# Altium PCB RFFE-Ver1.PcbDoc (part 1 of 2)
Units mm, origin at the board's own origin, x right, y up, seen from the top; angles counter-clockwise.
Board outline 405.96 x 196.35 mm, 6 copper layers (Top Layer, Internal Plane 1, Mid-Layer 1, Mid-Layer 2, Internal Plane 2, Bottom Layer); 512 components, 366 nets, 2013 pads, 0 vias.
Unrouted connection lines stored in the file: 1522.
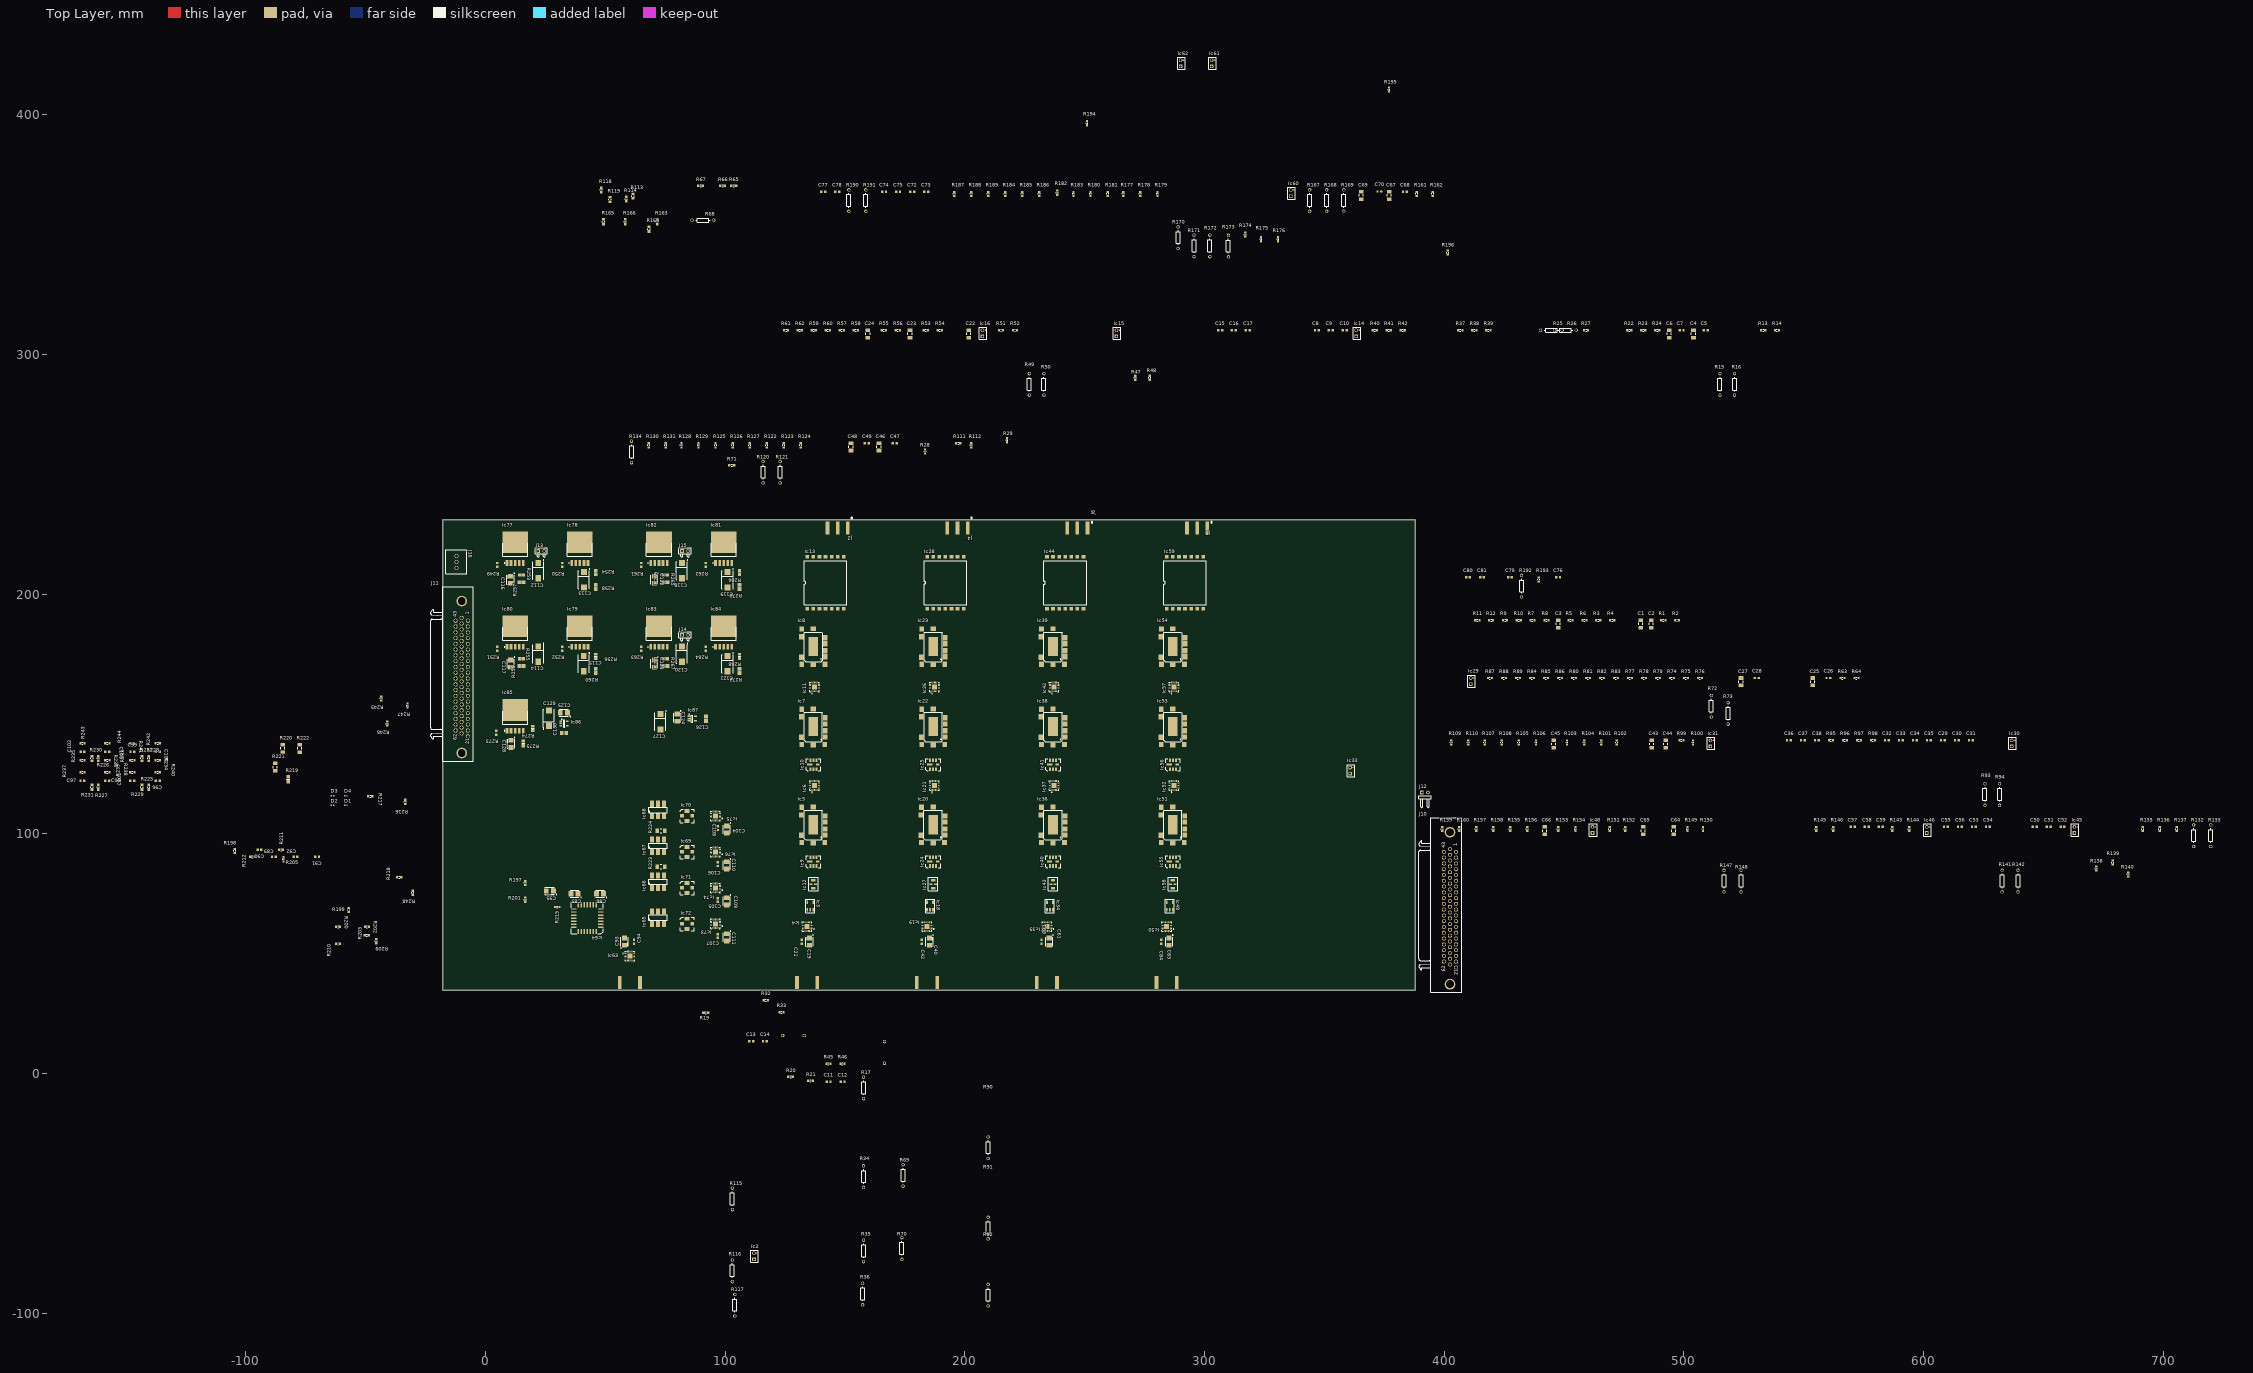
[diagram p0: Top Layer view]
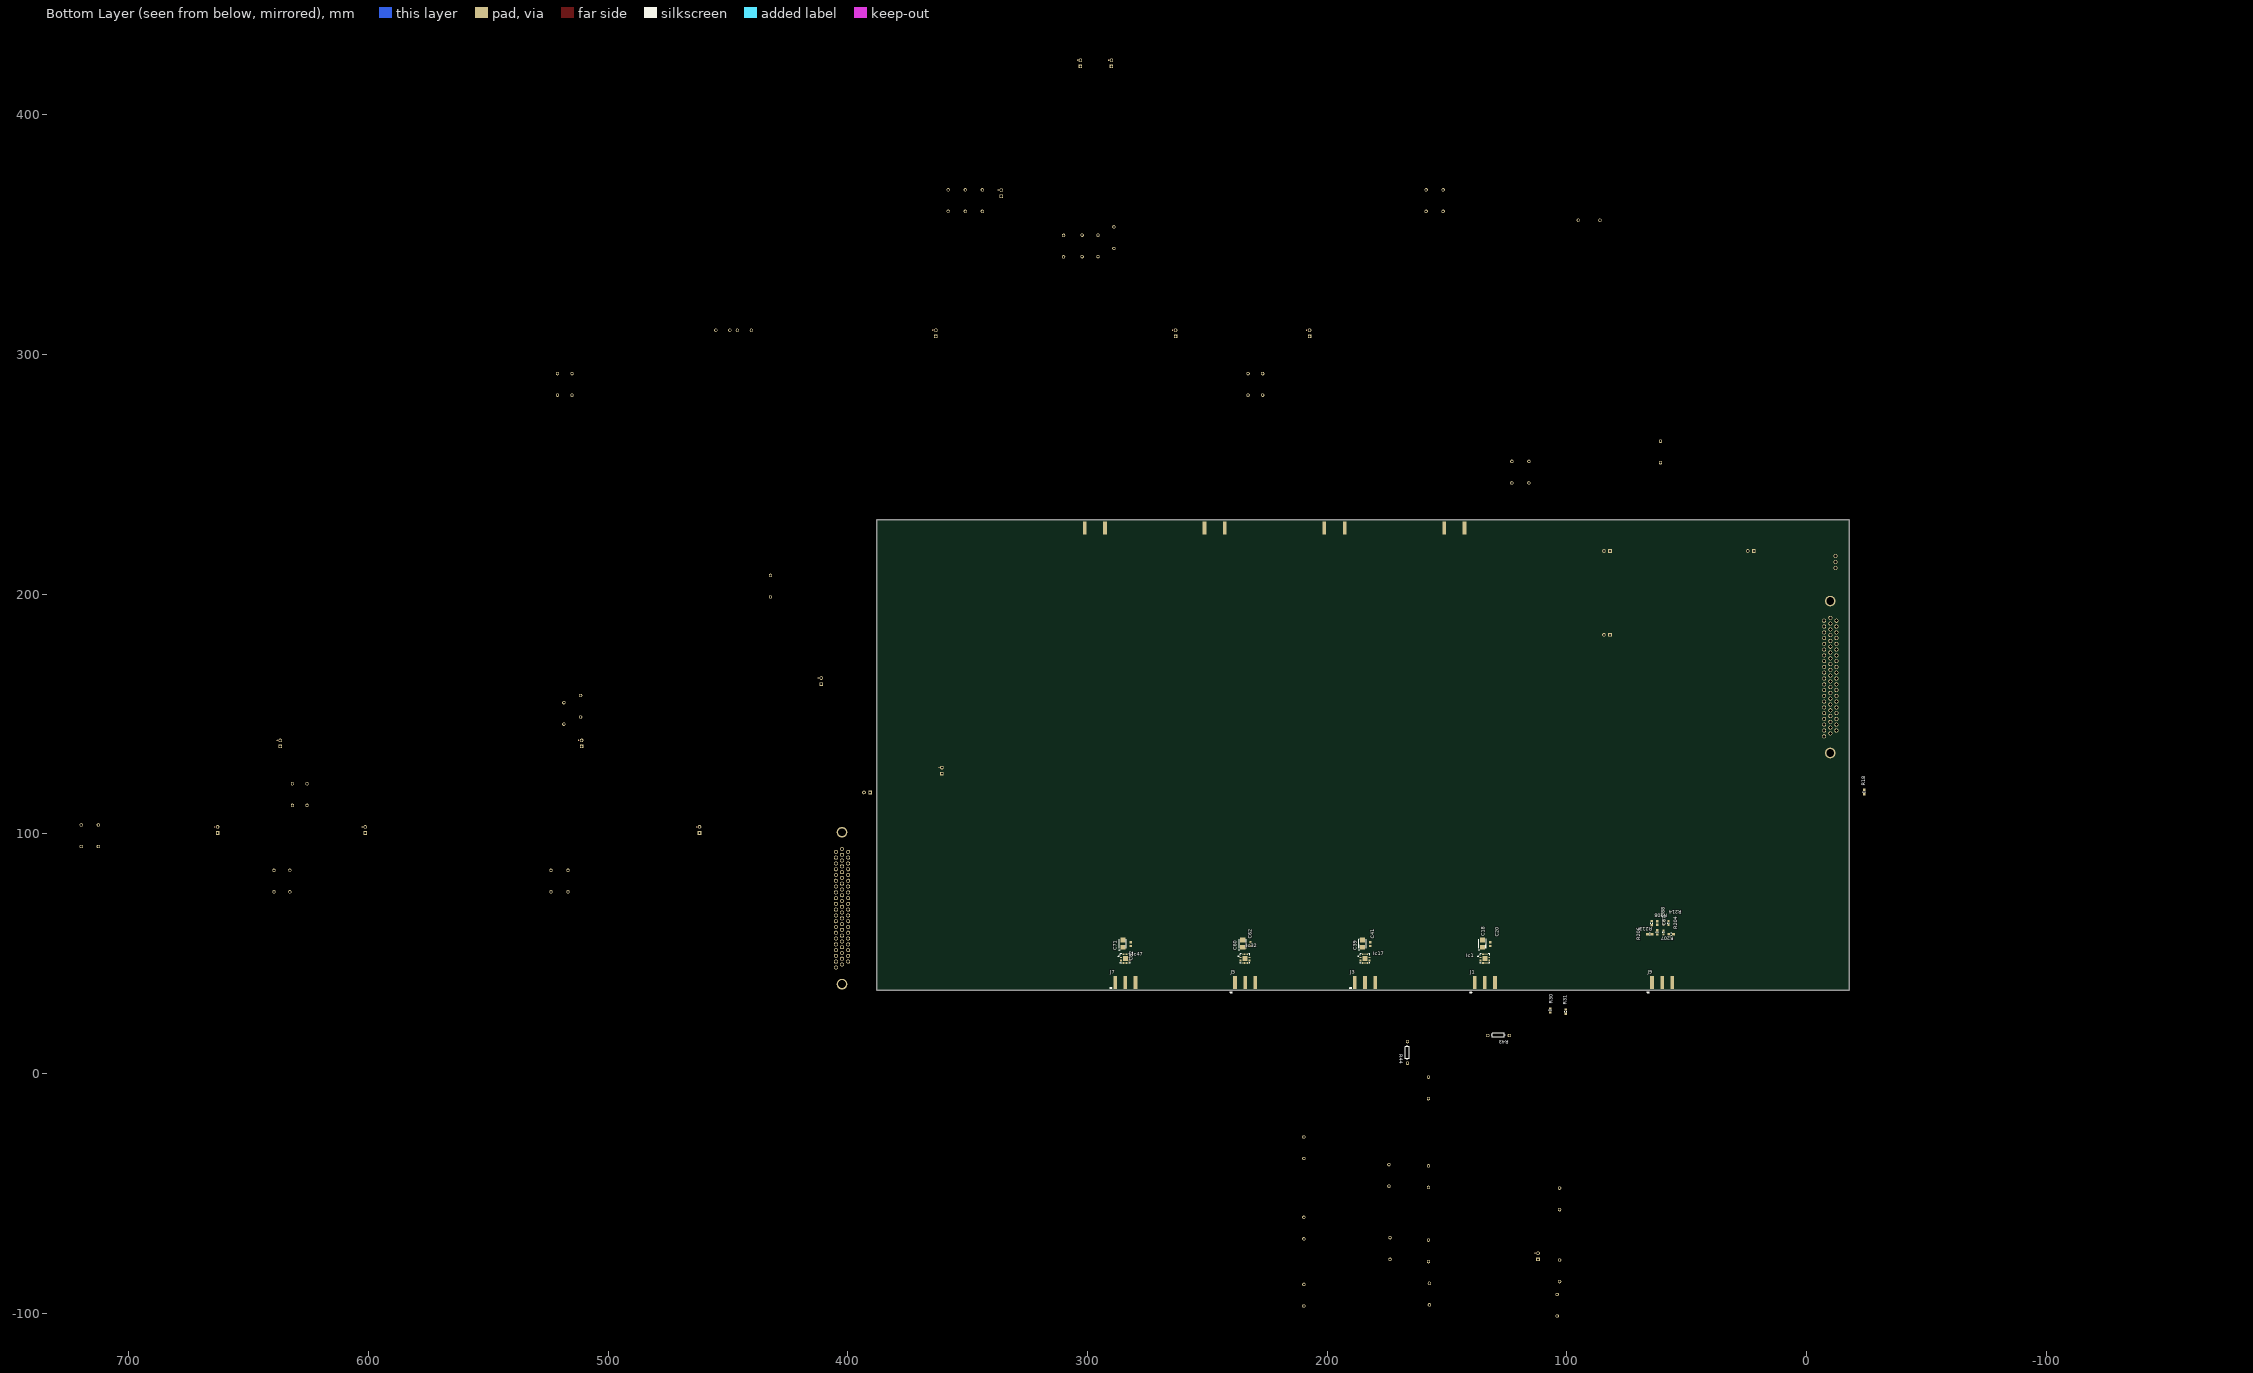
[diagram p1: Bottom Layer view, seen from below]
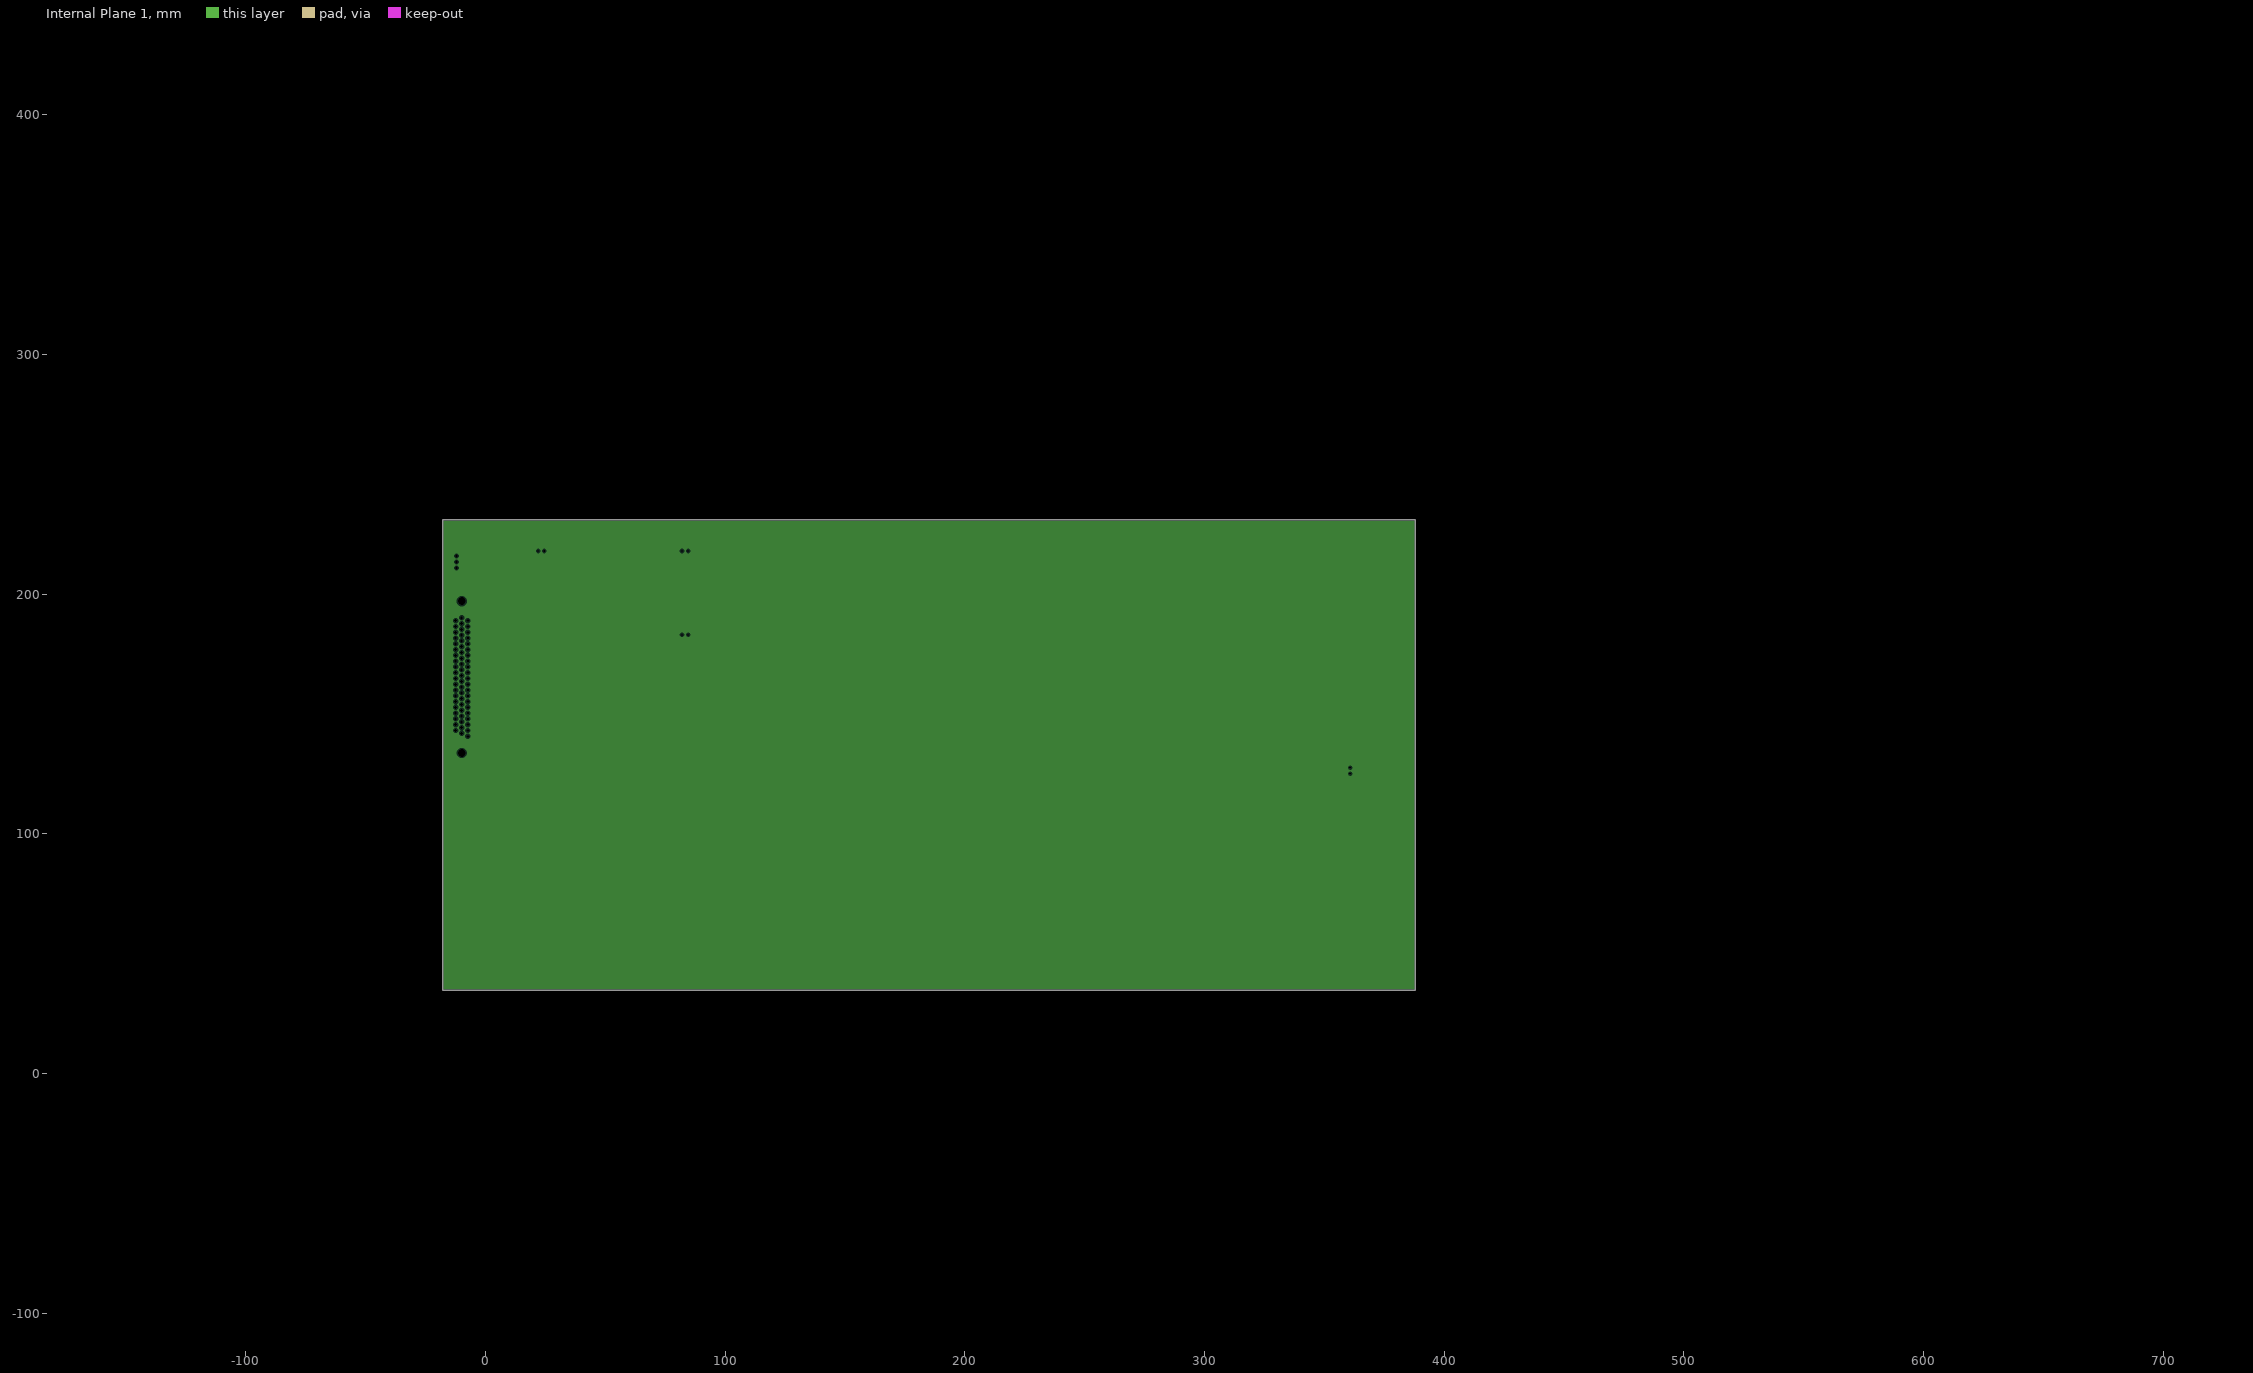
[diagram p2: Internal Plane 1, clearances drawn from the general rule]
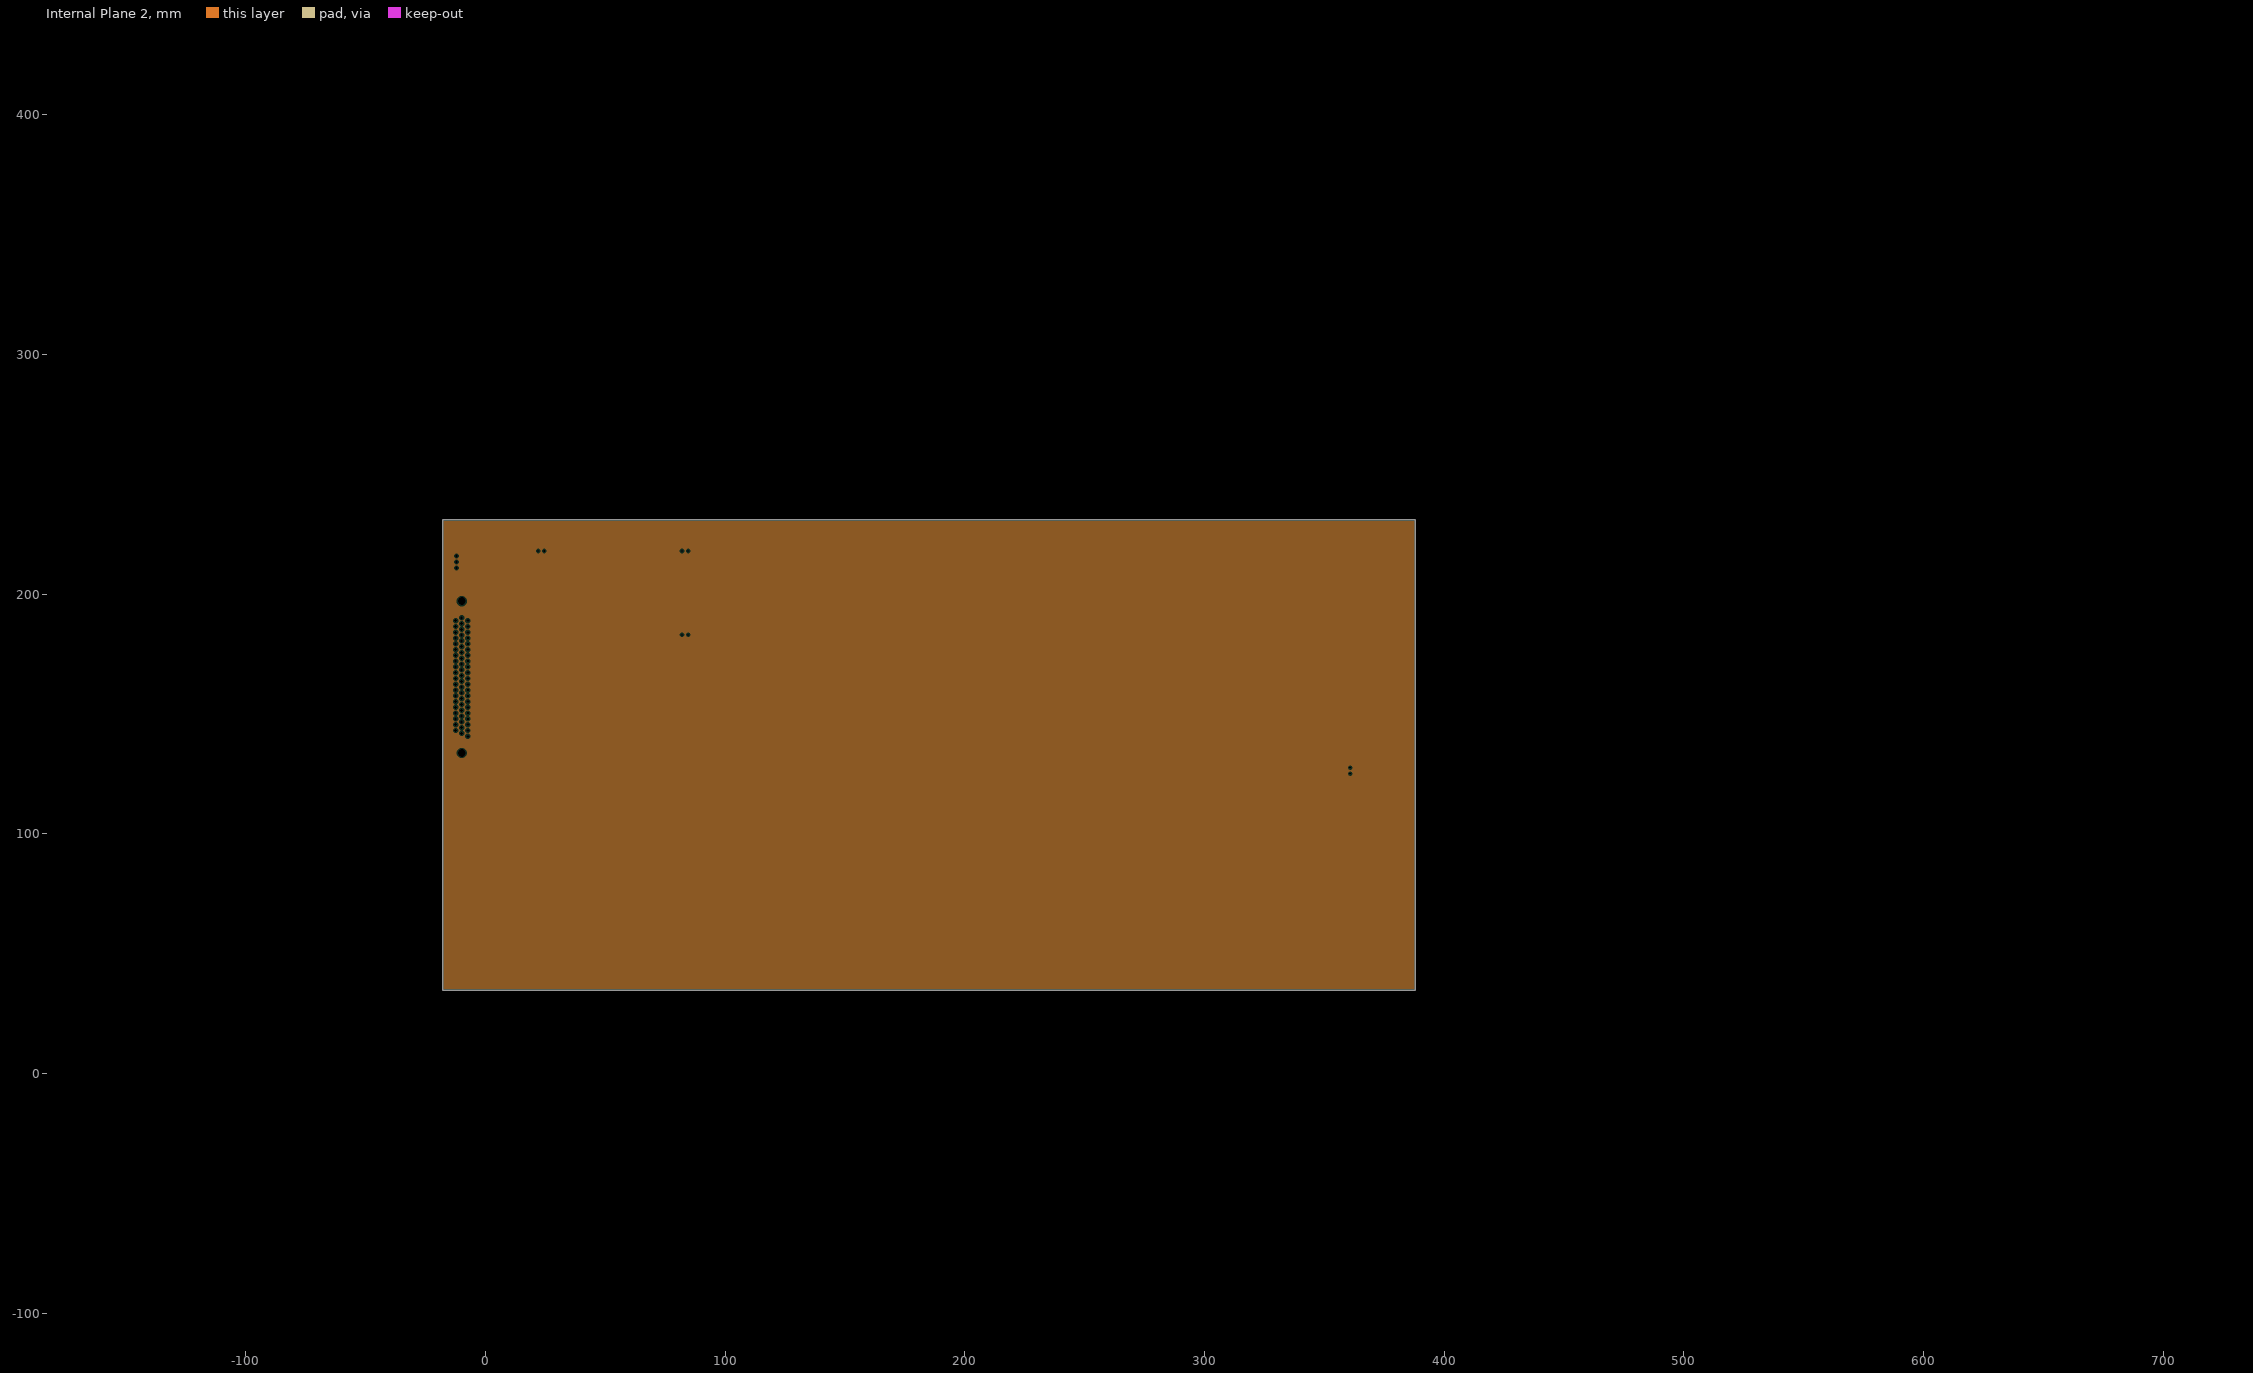
[diagram p3: Internal Plane 2, clearances drawn from the general rule]

## Layer stack, top to bottom
Top Layer: signal copper 0.0356
Dielectric: core 0.32, FR-4, Dk 4.8
Internal Plane 1: plane copper 0.0356
Dielectric: prepreg 0.32, FR-4, Dk 4.8
Mid-Layer 1: signal copper 0.0356
Dielectric: core 0.32, FR-4, Dk 4.8
Mid-Layer 2: signal copper 0.0356
Dielectric: prepreg 0.32, FR-4, Dk 4.8
Internal Plane 2: plane copper 0.0356
Dielectric: core 0.32, FR-4, Dk 4.8
Bottom Layer: signal copper 0.0356

## Board outline
-17.91,231 -17.91,34.65 -12.1,34.65 388.05,34.65 388.05,231 -17.91,231

## Design rules (kind name [scope] priority, off if disabled: settings)
Clearance [All] p1: gap=0.254
PlaneClearance [All] p1: clearance=0.508
PlaneConnect [All] p1: planeconnectstyle=Relief reliefexpansion=0.508 reliefentries=4 reliefconductorwidth=0.254 reliefairgap=0.254
PolygonConnect [All] p1: connectstyle=Relief reliefconductorwidth=0.254 reliefentries=4 polygonreliefangle="90 Angle"
RoomDefinition RFFE-Pilot-Ver1 [InComponentClass('RFFE-Pilot-Ver1')] p1: confinementstyle=ConfineIn formatcopy=TRUE lockcomponents=FALSE outline -17.91,34.65 112.5,34.65 112.5,127.01 -17.91,127.01
RoomDefinition RFFE-Ver1 [InComponentClass('RFFE-Ver1')] p2: confinementstyle=ConfineIn formatcopy=TRUE lockcomponents=FALSE outline 112.5,34.65 369.5,34.65 369.5,231 112.5,231
RoomDefinition RFFE-Supply-Ver1 [InComponentClass('RFFE-Supply-Ver1')] p3: confinementstyle=ConfineIn formatcopy=TRUE lockcomponents=FALSE outline -17.91,127.01 112.5,127.01 112.5,231 -17.91,231
RoutingVias [All] p1: holewidth=0.711 width=1.27 viastyle="Through Hole" minholewidth=0.711 minwidth=1.27 maxholewidth=0.711 maxwidth=1.27
SilkscreenOverComponentPads [All] p1: minsilkscreentomaskgap=0.254
SolderMaskExpansion [All] p1: expansion=0.102
Width [All] p1: maxlimit=0.254 minlimit=0.254 preferedwidth=0.254
25 further rules are at their usual default settings.

## Classes and differential pairs
component class RFFE-Ver1: C1 C2 C3 C4 C5 C6 C7 C8 C9 C10 C11 C12 C13 C14 C15 C16 C17 C18 C19 C20 C21 C22 C23 C24 C25 C26 C27 C28 C29 C30 C31 C32 C33 C34 C35 C36 C37 C38 C39 C40 C41 C42 C43 C44 C45 C46 C47 C48 C49 C50 C51 C52 C53 C54 C55 C56 C57 C58 C59 C60 C61 C62 C63 C64 C65 C66 C67 C68 C69 C70 C71 C72 C73 C74 C75 C76 C77 C78 C79 C80 C81 C82 C83 C84 Ic1 Ic2 Ic3 Ic4 Ic5 Ic6 Ic7 Ic8 Ic9 Ic10 Ic11 Ic12 Ic13 Ic14 Ic15 Ic16 Ic17 Ic18 Ic19 Ic20 Ic21 Ic22 Ic23 Ic24 Ic25 Ic26 Ic27 Ic28 Ic29 Ic30 Ic31 Ic32 Ic33 Ic34 Ic35 Ic36 Ic37 Ic38 Ic39 Ic40 Ic41 Ic42 Ic43 Ic44 Ic45 Ic46 Ic47 Ic48 Ic49 Ic50 Ic51 Ic52 Ic53 Ic54 Ic55 Ic56 Ic57 Ic58 Ic59 Ic60 Ic61 Ic62 J1 J2 J4 J5 J6 J8 R1 R2 R3 R4 R5 R6 R7 R8 R9 R10 R11 R12 R13 R14 R15 R16 R17 R18 R19 R20 R21 R22 R23 R24 R25 R26 R27 R28 R29 R30 R31 R32 R33 R34 R35 R36 R37 R38 R39 R40 R41 R42 R43 R44 R45 R46 R47 R48 R49 R50 R51 R52 R53 R54 R55 R56 R57 R58 R59 R60 R61 R62 R63 R64 R65 R66 R67 R68 R69 R70 R72 R73 R74 R75 R76 R77 R78 R79 R80 R81 R82 R83 R84 R85 R86 R87 R88 R89 R90 R91 R92 R93 R94 R95 R96 R97 R98 R99 R100 R101 R102 R103 R104 R105 R106 R107 R108 R109 R110 R111 R112 R113 R114 R115 R116 R117 R118 R119 R120 R121 R122 R123 R124 R125 R126 R127 R128 R129 R130 R131 R132 R133 R134 R135 R136 R137 R138 R139 R140 R141 R142 R143 R144 R145 R146 R147 R148 R149 R150 R151 R152 R153 R154 R155 R156 R157 R158 R159 R160 R161 R162 R163 R164 R165 R166 R167 R168 R169 R170 R171 R172 R173 R174 R175 R176 R177 R178 R179 R180 R181 R182 R183 R184 R185 R186 R187 R188 R189 R190 R191 R192 R193 R194 R195 R196
component class RFFE-Supply-Ver1: C112 C113 C114 C115 C116 C117 C118 C119 C120 C121 C122 C123 C124 C125 C126 C127 C128 C129 C130 Ic77 Ic78 Ic79 Ic80 Ic81 Ic82 Ic83 Ic84 Ic85 Ic86 Ic87 J8 J13 J14 J15 J16 R249 R250 R251 R252 R253 R254 R255 R256 R257 R258 R259 R260 R261 R262 R263 R264 R265 R266 R267 R268 R269 R270 R271 R272 R273 R274 R275
component class RFFE-Pilot-Ver1: C85 C86 C87 C88 C89 C90 C91 C92 C93 C94 C95 C96 C97 C98 C99 C100 C101 C102 C103 C104 C105 C106 C107 C108 C109 C110 C111 D1 D2 D3 D4 Ic63 Ic64 Ic65 Ic66 Ic67 Ic68 Ic69 Ic70 Ic71 Ic72 Ic73 Ic74 Ic75 Ic76 J6 J9 J11 R197 R198 R199 R200 R201 R202 R203 R205 R207 R208 R209 R210 R211 R212 R213 R214 R215 R216 R217 R218 R223 R224 R225 R226 R227 R228 R229 R230 R231 R232 R233 R234 R235 R236 R237 R238 R239 R240 R241 R242 R243 R244 R245 R246 R247 R248

## Components (designator, comment, footprint, x,y, rotation, side; value= is the part's Value field where it differs from the comment)
C1 "CAP CER 0.1UF" CAPC3216M 482.046,187.574 r90 top
C2 "CAP CER 0.1UF" CAPC3216M 486.364,187.574 r90 top
C3 "CAP CER 0.1UF" CAPC3216M 447.629,187.574 r90 top
C4 "CAP CER 0.1UF" CAPC3216M 504.032,308.574 r90 top
C5 "C1608C0G1H101J" CAPC1608N 509.112,310.098 r0 top
C6 "CAP CER 0.1UF" CAPC3216M 493.999,308.574 r90 top
C7 "C1608C0G1H101J" CAPC1608N 499.079,310.098 r0 top
C8 "C1608C0G1H470J" CAPC1608N 346.933,310.098 r0 top
C9 "C1608C0G1H470J" CAPC1608N 352.648,310.098 r0 top
C10 "C1608C0G1H470J" CAPC1608N 358.49,310.098 r0 top
C11 "C1608C0G1H470J" CAPC1608N 143.169,-3.502 r0 top
C12 "C1608C0G1H470J" CAPC1608N 149.011,-3.502 r0 top
C13 "C1608C0G1H470J" CAPC1608N 110.876,13.448 r0 top
C14 "C1608C0G1H470J" CAPC1608N 116.591,13.448 r0 top
C15 "C1608C0G1H470J" CAPC1608N 306.547,310.098 r0 top
C16 "C1608C0G1H470J" CAPC1608N 312.262,310.098 r0 top
C17 "C1608C0G1H470J" CAPC1608N 318.104,310.098 r0 top
C18 "CAP TANT 4.7UF" TC3528-1411 135.25,54.15 r90 bottom
C19 "CAP TANT 4.7UF" TC3528-1411 135.25,55 r270 top
C20 "C1608C0G1H101J" CAPC1608N 132,54 r90 bottom
C21 "C1608C0G1H101J" CAPC1608N 132,55 r270 top
C22 "CAP CER 0.1UF" CAPC3216M 201.645,308.574 r90 top
C23 "CAP CER 0.1UF" CAPC3216M 177.134,308.574 r90 top
C24 "CAP CER 0.1UF" CAPC3216M 159.608,308.574 r90 top
C25 "CAP CER 0.1UF" CAPC3216M 553.712,163.466 r90 top
C26 "C1608C0G1H101J" CAPC1608N 560.316,164.99 r0 top
C27 "CAP CER 0.1UF" CAPC3216M 523.867,163.466 r90 top
C28 "C1608C0G1H101J" CAPC1608N 530.471,164.99 r0 top
C29 "C1608C0G1H470J" CAPC1608N 608.116,138.99 r0 top
C30 "C1608C0G1H470J" CAPC1608N 613.958,138.99 r0 top
C31 "C1608C0G1H470J" CAPC1608N 619.8,138.99 r0 top
C32 "C1608C0G1H470J" CAPC1608N 584.748,138.99 r0 top
C33 "C1608C0G1H470J" CAPC1608N 590.59,138.99 r0 top
C34 "C1608C0G1H470J" CAPC1608N 596.432,138.99 r0 top
C35 "C1608C0G1H470J" CAPC1608N 602.274,138.99 r0 top
C36 "C1608C0G1H470J" CAPC1608N 543.854,138.99 r0 top
C37 "C1608C0G1H470J" CAPC1608N 549.696,138.99 r0 top
C38 "C1608C0G1H470J" CAPC1608N 555.538,138.99 r0 top
C39 "CAP TANT 4.7UF" TC3528-1411 185.25,54.15 r90 bottom
C40 "CAP TANT 4.7UF" TC3528-1411 185.25,55 r270 top
C41 "C1608C0G1H101J" CAPC1608N 182,54 r90 bottom
C42 "C1608C0G1H101J" CAPC1608N 182,55 r270 top
C43 "CAP CER 0.1UF" CAPC3216M 486.577,137.466 r90 top
C44 "CAP CER 0.1UF" CAPC3216M 492.419,137.466 r90 top
C45 "CAP CER 0.1UF" CAPC3216M 445.683,137.466 r90 top
C46 "CAP CER 0.1UF" CAPC3216M 164.211,261.466 r90 top
C47 "C1608C0G1H101J" CAPC1608N 170.815,262.99 r0 top
C48 "CAP CER 0.1UF" CAPC3216M 152.527,261.466 r90 top
C49 "C1608C0G1H101J" CAPC1608N 159.131,262.99 r0 top
C50 "C1608C0G1H470J" CAPC1608N 646.442,102.882 r0 top
C51 "C1608C0G1H470J" CAPC1608N 652.284,102.882 r0 top
C52 "C1608C0G1H470J" CAPC1608N 657.999,102.882 r0 top
C53 "C1608C0G1H470J" CAPC1608N 621.042,102.882 r0 top
C54 "C1608C0G1H470J" CAPC1608N 626.884,102.882 r0 top
C55 "C1608C0G1H470J" CAPC1608N 609.358,102.882 r0 top
C56 "C1608C0G1H470J" CAPC1608N 615.2,102.882 r0 top
C57 "C1608C0G1H470J" CAPC1608N 570.496,102.882 r0 top
C58 "C1608C0G1H470J" CAPC1608N 576.338,102.882 r0 top
C59 "C1608C0G1H470J" CAPC1608N 582.18,102.882 r0 top
C60 "CAP TANT 4.7UF" TC3528-1411 235.25,54.15 r90 bottom
C61 "CAP TANT 4.7UF" TC3528-1411 235.25,55 r270 top
C62 "C1608C0G1H101J" CAPC1608N 232,54 r90 bottom
C63 "C1608C0G1H101J" CAPC1608N 232,55 r270 top
C64 "CAP CER 0.1UF" CAPC3216M 495.82,101.358 r90 top
C65 "CAP CER 0.1UF" CAPC3216M 482.993,101.358 r90 top
C66 "CAP CER 0.1UF" CAPC3216M 441.972,101.358 r90 top
C67 "CAP CER 0.1UF" CAPC3216M 377.043,366.358 r90 top
C68 "C1608C0G1H101J" CAPC1608N 383.647,367.882 r0 top
C69 "CAP CER 0.1UF" CAPC3216M 365.359,366.358 r90 top
C70 "C1608C0G1H101J" CAPC1608N 373,368 r0 top
C71 "CAP TANT 4.7UF" TC3528-1411 285.25,54.15 r90 bottom
C72 "C1608C0G1H470J" CAPC1608N 178.034,367.882 r0 top
C73 "C1608C0G1H470J" CAPC1608N 183.876,367.882 r0 top
C74 "C1608C0G1H470J" CAPC1608N 166.35,367.882 r0 top
C75 "C1608C0G1H470J" CAPC1608N 172.192,367.882 r0 top
C76 "C1608C0G1H470J" CAPC1608N 447.537,206.995 r0 top
C77 "C1608C0G1H470J" CAPC1608N 140.95,367.882 r0 top
C78 "C1608C0G1H470J" CAPC1608N 146.792,367.882 r0 top
C79 "C1608C0G1H470J" CAPC1608N 427.471,206.995 r0 top
C80 "C1608C0G1H470J" CAPC1608N 409.945,206.995 r0 top
C81 "C1608C0G1H470J" CAPC1608N 415.787,206.995 r0 top
C82 "C1608C0G1H101J" CAPC1608N 282,54 r90 bottom
C83 "CAP TANT 4.7UF" TC3528-1411 285.25,55 r270 top
C84 "C1608C0G1H101J" CAPC1608N 282,55 r270 top
C85 "CAP TANT 4.7UF" TC3528-1411 37.18,75.01 r180 top
C86 "CAP TANT 4.7UF" TC3528-1411 47.79,75.01 r180 top
C87 "C1608C0G1H470J" CAPC1608N 62.26,62.78 r90 bottom
C88 "C1608C0G1H470J" CAPC1608N 59.68,62.82 r90 bottom
C89 "C1608C0G1H470J" CAPC1608N -88.25,90.35 r180 top
C90 "C1608C0G1H470J" CAPC1608N -94.25,93.35 r180 top
C91 "C1608C0G1H470J" CAPC1608N -70.25,90.35 r180 top
C92 "C1608C0G1H470J" CAPC1608N -79.25,90.35 r180 top
C93 "CAP TANT 4.7UF" TC3528-1411 58,55 r90 top
C94 "C1608C0G1H101J" CAPC1608N 62,55 r90 top
C95 "CAP TANT 4.7UF" TC3528-1411 26.9,76.15 r180 top
C96 "C1608C0G1H470J" CAPC1608N -136.75,122.21 r180 top
C97 "C1608C0G1H470J" CAPC1608N -168.13,122.21 r0 top
C98 "C1608C0G1H470J" CAPC1608N -147.32,122.21 r0 top
C99 "C1608C0G1H470J" CAPC1608N -147.27,134.21 r0 top
C100 "C1608C0G1H470J" CAPC1608N -136.75,134.21 r0 top
C101 "C1608C0G1H470J" CAPC1608N -157.74,122.21 r180 top
C102 "C1608C0G1H470J" CAPC1608N -168.12,134.21 r180 top
C103 "C1608C0G1H470J" CAPC1608N -157.74,134.21 r0 top
C104 "C1608C0G1H101J" CAPC1608N 96.99,102.37 r270 top
C105 "C1608C0G1H101J" CAPC1608N 96.99,72.38 r270 top
C106 "C1608C0G1H101J" CAPC1608N 96.99,87.37 r270 top
C107 "C1608C0G1H101J" CAPC1608N 96.99,57.36 r270 top
C108 "CAP TANT 4.7UF" TC3528-1411 100.69,101.82 r270 top
C109 "CAP TANT 4.7UF" TC3528-1411 100.69,71.83 r270 top
C110 "CAP TANT 4.7UF" TC3528-1411 100.69,86.83 r270 top
C111 "CAP TANT 4.7UF" TC3528-1411 100.69,56.81 r270 top
C112 "CAP TANT 33UF" TC7343-2917 22,209.8 r270 top
C113 "CAP TANT 33UF" TC7343-2917 41.1,206 r270 top
C114 "CAP TANT 33UF" TC7343-2917 22,175 r270 top
C115 "CAP TANT 33UF" TC7343-2917 41,171 r270 top
C116 "CAP TANT 10UF" TC3528-1411 10.5,206 r270 top
C117 "CAP TANT 10UF" TC3528-1411 10.55,171 r270 top
C118 "CAP TANT 33UF" TC7343-2917 82,209.8 r270 top
C119 "CAP TANT 33UF" TC7343-2917 101,206 r270 top
C120 "CAP TANT 33UF" TC7343-2917 82,175 r270 top
C121 "CAP TANT 33UF" TC7343-2917 101,171 r270 top
C122 "CAP TANT 10UF" TC3528-1411 70.5,206 r270 top
C123 "CAP TANT 10UF" TC3528-1411 70.5,171 r270 top
C124 "CAP TANT 10UF" TC3528-1411 80,148.5 r270 top
C125 "CAP TANT 10UF" TC3528-1411 32.7,150.5 r180 top
C126 "CAP CER 10000PF" CAPC2012M 92,148 r270 top
C127 "CAP TANT 33UF" TC7343-2917 73,146.75 r270 top
C128 "CAP TANT 10UF" TC3528-1411 10.7,137.5 r270 top
C129 "CAP TANT 33UF" TC7343-2917 26.5,148.25 r90 top
C130 "CAP CER 10000PF" CAPC2012M 32.75,142 r180 top
D1 "RB521CS-30T2R" RESC1005L -58.25,111.85 r0 top
D2 "RB521CS-30T2R" RESC1005L -63.75,111.85 r0 top
D3 "RB521CS-30T2R" RESC1005L -63.75,115.85 r0 top
D4 "RB521CS-30T2R" RESC1005L -58.25,115.85 r0 top
Ic1 "HSWA2-30DR+" DG983-1 134.25,47.9 r180 bottom
Ic2 "DETECTOR RTD TF 100 OHM +/-0.06%" RTDX2 112.04,-77.55 r90 top
Ic3 "SBTC-2-10L+" AT1029 136.79,71.45 r270 top
Ic4 "HSWA2-30DR+" DG983-1 134.25,61.25 r180 top
Ic5 "TAMP-72LN+" JQ1382 141.79,96.36 r90 top
Ic6 "DAT-31R5-SP+" DG983-1 137.29,120.15 r90 top
Ic7 "TAMP-72LN+" JQ1382 141.81,137.31 r90 top
Ic8 "TAMP-72LN+" JQ1382 141.82,170.72 r90 top
Ic9 "TA0568A" TST-TA0568A 135.53,86.57 r90 top
Ic10 "TA0568A" TST-TA0568A 135.54,127 r90 top
Ic11 "DAT-31R5-SP+" DG983-1 137.31,161.32 r90 top
Ic12 "LFCN-530+" FV1206 136.8,77.37 r90 top
Ic13 "BPF-C495+" HU1186 134.28,193.95 r90 top
Ic14 "DETECTOR RTD TF 100 OHM +/-0.06%" RTDX2 363.316,307.558 r90 top
Ic15 "DETECTOR RTD TF 100 OHM +/-0.06%" RTDX2 263.24,307.558 r90 top
Ic16 "DETECTOR RTD TF 100 OHM +/-0.06%" RTDX2 207.36,307.558 r90 top
Ic17 "HSWA2-30DR+" DG983-1 184.25,47.9 r180 bottom
Ic18 "SBTC-2-10L+" AT1029 186.79,71.45 r270 top
Ic19 "HSWA2-30DR+" DG983-1 184.25,61.25 r180 top
Ic20 "TAMP-72LN+" JQ1382 191.79,96.36 r90 top
Ic21 "DAT-31R5-SP+" DG983-1 187.29,120.15 r90 top
Ic22 "TAMP-72LN+" JQ1382 191.81,137.31 r90 top
Ic23 "TAMP-72LN+" JQ1382 191.82,170.72 r90 top
Ic24 "TA0568A" TST-TA0568A 185.53,86.57 r90 top
Ic25 "TA0568A" TST-TA0568A 185.54,127 r90 top
Ic26 "DAT-31R5-SP+" DG983-1 187.31,161.32 r90 top
Ic27 "LFCN-530+" FV1206 186.8,77.37 r90 top
Ic28 "BPF-C495+" HU1186 184.28,193.95 r90 top
Ic29 "DETECTOR RTD TF 100 OHM +/-0.06%" RTDX2 411.091,162.45 r90 top
Ic30 "DETECTOR RTD TF 100 OHM +/-0.06%" RTDX2 636.818,136.45 r90 top
Ic31 "DETECTOR RTD TF 100 OHM +/-0.06%" RTDX2 511.088,136.45 r90 top
Ic32 "HSWA2-30DR+" DG983-1 234.25,47.9 r180 bottom
Ic33 "DETECTOR RTD TF 100 OHM +/-0.06%" RTDX2 360.758,125.097 r90 top
Ic34 "SBTC-2-10L+" AT1029 236.79,71.45 r270 top
Ic35 "HSWA2-30DR+" DG983-1 234.25,61.25 r180 top
Ic36 "TAMP-72LN+" JQ1382 241.79,96.36 r90 top
Ic37 "DAT-31R5-SP+" DG983-1 237.29,120.15 r90 top
Ic38 "TAMP-72LN+" JQ1382 241.81,137.31 r90 top
Ic39 "TAMP-72LN+" JQ1382 241.82,170.72 r90 top
Ic40 "TA0568A" TST-TA0568A 235.53,86.57 r90 top
Ic41 "TA0568A" TST-TA0568A 235.54,127 r90 top
Ic42 "DAT-31R5-SP+" DG983-1 237.31,161.32 r90 top
Ic43 "LFCN-530+" FV1206 236.8,77.37 r90 top
Ic44 "BPF-C495+" HU1186 234.28,193.95 r90 top
Ic45 "DETECTOR RTD TF 100 OHM +/-0.06%" RTDX2 662.952,100.342 r90 top
Ic46 "DETECTOR RTD TF 100 OHM +/-0.06%" RTDX2 601.357,100.342 r90 top
Ic47 "HSWA2-30DR+" DG983-1 284.25,47.9 r180 bottom
Ic48 "DETECTOR RTD TF 100 OHM +/-0.06%" RTDX2 461.911,100.342 r90 top
Ic49 "SBTC-2-10L+" AT1029 286.79,71.45 r270 top
Ic50 "HSWA2-30DR+" DG983-1 284.25,61.25 r180 top
Ic51 "TAMP-72LN+" JQ1382 291.79,96.36 r90 top
Ic52 "DAT-31R5-SP+" DG983-1 287.29,120.15 r90 top
Ic53 "TAMP-72LN+" JQ1382 291.81,137.31 r90 top
Ic54 "TAMP-72LN+" JQ1382 291.82,170.72 r90 top
Ic55 "TA0568A" TST-TA0568A 285.53,86.57 r90 top
Ic56 "TA0568A" TST-TA0568A 285.54,127 r90 top
Ic57 "DAT-31R5-SP+" DG983-1 287.31,161.32 r90 top
Ic58 "LFCN-530+" FV1206 286.8,77.37 r90 top
Ic59 "BPF-C495+" HU1186 284.28,193.95 r90 top
Ic60 "DETECTOR RTD TF 100 OHM +/-0.06%" RTDX2 336,366 r90 top
Ic61 "DETECTOR RTD TF 100 OHM +/-0.06%" RTDX2 303.008,420.205 r90 top
Ic62 "DETECTOR RTD TF 100 OHM +/-0.06%" RTDX2 290.054,420.205 r90 top
Ic63 "HSWA2-30DR+" DG983-1 60.248,49.05 r0 top
Ic64 "GSWA-4-30DR" AN1102 48.09,61.01 r180 top
Ic65 "ADC-10-4+" CD542 71.99,65.01 r90 top
Ic66 "ADC-10-4+" CD542 71.99,80.01 r90 top
Ic67 "ADC-10-4+" CD542 71.99,95.01 r90 top
Ic68 "ADC-10-4+" CD542 71.99,110.01 r90 top
Ic69 "PAT-1+" AF320 81.99,92.47 r0 top
Ic70 "PAT-0+" AF320 81.99,107.47 r0 top
Ic71 "PAT-2+" AF320 81.99,77.47 r0 top
Ic72 "PAT-3+" AF320 81.99,62.47 r0 top
Ic73 "HSWA2-30DR+" DG983-1 95.99,62.46 r180 top
Ic74 "HSWA2-30DR+" DG983-1 95.99,77.47 r180 top
Ic75 "HSWA2-30DR+" DG983-1 95.99,107.47 r180 top
Ic76 "HSWA2-30DR+" DG983-1 95.99,92.47 r180 top
Ic77 "IC LDO LO NOISE 3A ADJ DDPAK-5" "DD Pak" 9,213 r90 top
Ic78 "IC LDO LO NOISE 3A ADJ DDPAK-5" "DD Pak" 36,213 r90 top
Ic79 "IC LDO LO NOISE 3A ADJ DDPAK-5" "DD Pak" 36,178 r90 top
Ic80 "IC LDO LO NOISE 3A ADJ DDPAK-5" "DD Pak" 9,178 r90 top
Ic81 "IC LDO LO NOISE 3A ADJ DDPAK-5" "DD Pak" 96,213 r90 top
Ic82 "IC LDO LO NOISE 3A ADJ DDPAK-5" "DD Pak" 69,213 r90 top
Ic83 "IC LDO LO NOISE 3A ADJ DDPAK-5" "DD Pak" 69,178 r90 top
Ic84 "IC LDO LO NOISE 3A ADJ DDPAK-5" "DD Pak" 96,178 r90 top
Ic85 "IC LDO LO NOISE 3A ADJ DDPAK-5" "DD Pak" 9,143 r90 top
Ic86 "TPS73030DBVT" DBV005 31.5,147 r0 top
Ic87 "LT1964ES5-5#TRMPBF" TSOT-23 85,149 r0 top
J1 "CONN SMA" SMAedge50R 138.501,38 r180 bottom
J2 "CONN SMA" SMAedge50R 151.23,227.65 r180 top
J3 "CONN SMA" SMAedge50R 188.501,38 r180 bottom
J4 "CONN SMA" SMAedge50R 201.23,227.65 r180 top
J5 "CONN SMA" SMAedge50R 238.501,38 r180 bottom
J6 "CONN SMA" SMAedge50R 251.23,227.65 r180 top
J7 "CONN SMA" SMAedge50R 288.501,38 r180 bottom
J8 "CONN SMA" SMAedge50R 301.23,227.65 r180 top
J9 "CONN SMA" SMAedge50R 64.501,37.99 r180 bottom
J10 "CONN D-SUB" D-SUB62 404.984,92.453 r90 top
J11 "CONN D-SUB" D-SUB62 -7.35,188.9 r90 top
J12 "CONN HEADR" HDR1X2H 390.734,117.253 r0 top
J13 "CONN HEADR" HDR1X2H 22,218 r0 top
J14 "CONN HEADR" HDR1X2H 82,183 r0 top
J15 "CONN HEADR" HDR1X2H 82,218 r0 top
J16 "CONN TERM 3POS" Axial3 -12.1,215.9 r270 top
R1 "PNM0603E1002BST5" RESC1608N 491.444,189.098 r0 top
R2 "PNM0603E1002BST5" RESC1608N 497.159,189.098 r0 top
R3 "PNM0603E1002BST5" RESC1608N 464.266,189.098 r0 top
R4 "PNM0603E1002BST5" RESC1608N 470.108,189.098 r0 top
R5 "PNM0603E1002BST5" RESC1608N 452.709,189.098 r0 top
R6 "PNM0603E1002BST5" RESC1608N 458.551,189.098 r0 top
R7 "PNM0603E1002BST5" RESC1608N 436.834,189.098 r0 top
R8 "PNM0603E1002BST5" RESC1608N 442.676,189.098 r0 top
R9 "PNM0603E1002BST5" RESC1608N 425.404,189.098 r0 top
R10 "PNM0603E1002BST5" RESC1608N 431.119,189.098 r0 top
R11 "PNM0603E1002BST5" RESC1608N 413.847,189.098 r0 top
R12 "PNM0603E1002BST5" RESC1608N 419.562,189.098 r0 top
R13 "PNM0603E1002BST5" RESC1608N 533.115,310.098 r0 top
R14 "PNM0603E1002BST5" RESC1608N 538.83,310.098 r0 top
R15 "CMF5546R400FHEB" AXIAL9.0 515.081,290.286 r90 top
R16 "CMF5546R400FHEB" AXIAL9.0 521.177,290.286 r90 top
R17 "CMF5546R400FHEB" AXIAL9.0 157.77,-3.24 r90 top
R18 "RES 0.0 OHM" RESC1608M -24.1,117.4 r90 bottom
R19 "RES 0.0 OHM" RESC1608M 91.95,25.35 r0 top
R20 "RES 0.0 OHM" RESC1608M 127.331,-1.381 r0 top
R21 "RES 0.0 OHM" RESC1608M 135.627,-3.012 r0 top
R22 "FC0603E1000BST1" RESC1608N 477.235,310.098 r0 top
R23 "FC0603E1000BST1" RESC1608N 483.077,310.098 r0 top
R24 "FC0603E1000BST1" RESC1608N 488.919,310.098 r0 top
R25 "CMF5546R400FHEB" AXIAL9.0 447.517,310.098 r0 top
R26 "CMF5546R400FHEB" AXIAL9.0 453.359,310.098 r0 top
R27 "FC0603E1000BST1" RESC1608N 459.201,310.098 r0 top
R28 "FC0603E1000BST1" RESC1608N 183.42,259.51 r90 top
R29 "FC0603E1000BST1" RESC1608N 217.6,264.21 r90 top
R30 "FC0603E1000BST1" RESC1608N 106.95,26.3 r90 bottom
R31 "FC0603E1000BST1" RESC1608N 100.4,25.8 r90 bottom
R32 "FC0603E1000BST1" RESC1608N 117,30.5 r0 top
R33 "FC0603E1000BST1" RESC1608N 123.5,25.5 r0 top
R34 "CMF5546R400FHEB" AXIAL9.0 157.77,-40.24 r90 top
R35 "CMF5546R400FHEB" AXIAL9.0 157.77,-71.24 r90 top
R36 "CMF5546R400FHEB" AXIAL9.0 157.37,-89.24 r90 top
R37 "PNM0603E1002BST5" RESC1608N 406.75,310.098 r0 top
R38 "PNM0603E1002BST5" RESC1608N 412.592,310.098 r0 top
R39 "PNM0603E1002BST5" RESC1608N 418.434,310.098 r0 top
R40 "PNM0603E1002BST5" RESC1608N 371.063,310.098 r0 top
R41 "PNM0603E1002BST5" RESC1608N 376.905,310.098 r0 top
R42 "PNM0603E1002BST5" RESC1608N 382.747,310.098 r0 top
R43 "CMF5546R400FHEB" AXIAL9.0 131.3,15.85 r0 bottom
R44 "CMF5546R400FHEB" AXIAL9.0 166.5,6 r270 bottom
R45 "PNM0603E1002BST5" RESC1608N 143.113,4.098 r0 top
R46 "PNM0603E1002BST5" RESC1608N 148.955,4.098 r0 top
R47 "PNM0603E1002BST5" RESC1608N 271.114,290.286 r90 top
R48 "PNM0603E1002BST5" RESC1608N 277.21,290.286 r90 top
R49 "CMF5546R400FHEB" AXIAL9.0 226.918,290.286 r90 top
R50 "CMF5546R400FHEB" AXIAL9.0 233.014,290.286 r90 top
R51 "PNM0603E1002BST5" RESC1608N 215.107,310.098 r0 top
R52 "PNM0603E1002BST5" RESC1608N 220.949,310.098 r0 top
R53 "PNM0603E1002BST5" RESC1608N 183.738,310.098 r0 top
R54 "PNM0603E1002BST5" RESC1608N 189.58,310.098 r0 top
R55 "PNM0603E1002BST5" RESC1608N 166.212,310.098 r0 top
R56 "PNM0603E1002BST5" RESC1608N 172.054,310.098 r0 top
R57 "PNM0603E1002BST5" RESC1608N 148.686,310.098 r0 top
R58 "PNM0603E1002BST5" RESC1608N 154.528,310.098 r0 top
R59 "PNM0603E1002BST5" RESC1608N 137.002,310.098 r0 top
R60 "PNM0603E1002BST5" RESC1608N 142.844,310.098 r0 top
R61 "PNM0603E1002BST5" RESC1608N 125.445,310.098 r0 top
R62 "PNM0603E1002BST5" RESC1608N 131.16,310.098 r0 top
R63 "PNM0603E1002BST5" RESC1608N 566.158,164.99 r0 top
R64 "PNM0603E1002BST5" RESC1608N 572,164.99 r0 top
R65 "RES 0.0 OHM" RESC1608M 103.575,370.338 r0 top
R66 "RES 0.0 OHM" RESC1608M 98.967,370.338 r0 top
R67 "RES 0.0 OHM" RESC1608M 89.751,370.338 r0 top
R68 "CMF5546R400FHEB" AXIAL9.0 93.5,356 r0 top
R69 "CMF5546R400FHEB" AXIAL9.0 174.27,-39.74 r90 top
R70 "CMF5546R400FHEB" AXIAL9.0 173.77,-70.24 r90 top
R71 "RES 0.0 OHM" RESC1608M 102.75,253.79 r0 top
R72 "CMF5546R400FHEB" AXIAL9.0 511.5,156 r90 top
R73 "CMF5546R400FHEB" AXIAL9.0 518.5,153 r90 top
R74 "FC0603E1000BST1" RESC1608N 495.038,164.99 r0 top
R75 "FC0603E1000BST1" RESC1608N 500.88,164.99 r0 top
R76 "FC0603E1000BST1" RESC1608N 506.722,164.99 r0 top
R77 "FC0603E1000BST1" RESC1608N 477.512,164.99 r0 top
R78 "FC0603E1000BST1" RESC1608N 483.354,164.99 r0 top
R79 "FC0603E1000BST1" RESC1608N 489.196,164.99 r0 top
R80 "FC0603E1000BST1" RESC1608N 454.144,164.99 r0 top
R81 "FC0603E1000BST1" RESC1608N 459.986,164.99 r0 top
R82 "FC0603E1000BST1" RESC1608N 465.828,164.99 r0 top
R83 "FC0603E1000BST1" RESC1608N 471.67,164.99 r0 top
R84 "PNM0603E1002BST5" RESC1608N 436.618,164.99 r0 top
R85 "PNM0603E1002BST5" RESC1608N 442.46,164.99 r0 top
R86 "PNM0603E1002BST5" RESC1608N 448.302,164.99 r0 top
R87 "PNM0603E1002BST5" RESC1608N 419.092,164.99 r0 top
R88 "PNM0603E1002BST5" RESC1608N 424.934,164.99 r0 top
R89 "PNM0603E1002BST5" RESC1608N 430.776,164.99 r0 top
R90 "CMF5546R400FHEB" AXIAL9.0 209.76,-28.21 r90 top
R91 "CMF5546R400FHEB" AXIAL9.0 209.76,-61.71 r90 top
R92 "CMF5546R400FHEB" AXIAL9.0 209.76,-89.71 r90 top
R93 "CMF5546R400FHEB" AXIAL9.0 625.642,119.178 r90 top
R94 "CMF5546R400FHEB" AXIAL9.0 631.738,119.178 r90 top
R95 "PNM0603E1002BST5" RESC1608N 561.38,138.99 r0 top
R96 "PNM0603E1002BST5" RESC1608N 567.222,138.99 r0 top
R97 "PNM0603E1002BST5" RESC1608N 573.064,138.99 r0 top
R98 "PNM0603E1002BST5" RESC1608N 578.906,138.99 r0 top
R99 "PNM0603E1002BST5" RESC1608N 499.023,138.99 r0 top
R100 "PNM0603E1002BST5" RESC1608N 503.849,138.101 r90 top
R101 "PNM0603E1002BST5" RESC1608N 465.495,138.101 r90 top
R102 "PNM0603E1002BST5" RESC1608N 472.099,138.101 r90 top
R103 "PNM0603E1002BST5" RESC1608N 451.271,138.101 r90 top
R104 "PNM0603E1002BST5" RESC1608N 458.383,138.101 r90 top
R105 "PNM0603E1002BST5" RESC1608N 431.205,138.101 r90 top
R106 "PNM0603E1002BST5" RESC1608N 438.317,138.101 r90 top
R107 "PNM0603E1002BST5" RESC1608N 416.981,138.101 r90 top
R108 "PNM0603E1002BST5" RESC1608N 424.093,138.101 r90 top
R109 "PNM0603E1002BST5" RESC1608N 403.011,138.101 r90 top
R110 "PNM0603E1002BST5" RESC1608N 410.123,138.101 r90 top
R111 "PNM0603E1002BST5" RESC1608N 197.231,262.99 r0 top
R112 "PNM0603E1002BST5" RESC1608N 202.692,262.101 r90 top
R113 "RES 0.0 OHM" RESC1608M 61.571,366.079 r90 top
R114 "RES 0.0 OHM" RESC1608M 58.731,364.849 r90 top
R115 "CMF5546R400FHEB" AXIAL9.0 103.04,-49.55 r90 top
R116 "CMF5546R400FHEB" AXIAL9.0 103.04,-79.55 r90 top
R117 "CMF5546R400FHEB" AXIAL9.0 104.04,-93.9 r90 top
R118 "RES 0.0 OHM" RESC1608M 48.365,368.628 r90 top
R119 "RES 0.0 OHM" RESC1608M 51.981,364.649 r90 top
R120 "CMF5546R400FHEB" AXIAL9.0 115.85,253.678 r90 top
R121 "CMF5546R400FHEB" AXIAL9.0 122.962,253.678 r90 top
R122 "FC0603E1000BST1" RESC1608N 117.348,262.101 r90 top
R123 "FC0603E1000BST1" RESC1608N 124.46,262.101 r90 top
R124 "FC0603E1000BST1" RESC1608N 131.572,262.101 r90 top
R125 "FC0603E1000BST1" RESC1608N 96.012,262.101 r90 top
R126 "FC0603E1000BST1" RESC1608N 103.124,262.101 r90 top
R127 "FC0603E1000BST1" RESC1608N 110.236,262.101 r90 top
R128 "FC0603E1000BST1" RESC1608N 81.788,262.101 r90 top
R129 "FC0603E1000BST1" RESC1608N 88.9,262.101 r90 top
R130 "FC0603E1000BST1" RESC1608N 68.072,262.101 r90 top
R131 "FC0603E1000BST1" RESC1608N 75.184,262.101 r90 top
R132 "CMF5546R400FHEB" AXIAL9.0 712.736,101.993 r90 top
R133 "CMF5546R400FHEB" AXIAL9.0 719.848,101.993 r90 top
R134 "CMF5546R400FHEB" AXIAL9.0 60.96,262.101 r90 top
R135 "PNM0603E1002BST5" RESC1608N 691.4,101.993 r90 top
R136 "PNM0603E1002BST5" RESC1608N 698.512,101.993 r90 top
R137 "PNM0603E1002BST5" RESC1608N 705.624,101.993 r90 top
R138 "PNM0603E1002BST5" RESC1608N 672,85.5 r90 top
R139 "PNM0603E1002BST5" RESC1608N 679,88 r90 top
R140 "PNM0603E1002BST5" RESC1608N 685.431,83.07 r90 top
R141 "CMF5546R400FHEB" AXIAL9.0 632.853,83.07 r90 top
R142 "CMF5546R400FHEB" AXIAL9.0 639.457,83.07 r90 top
R143 "PNM0603E1002BST5" RESC1608N 587.006,101.993 r90 top
R144 "PNM0603E1002BST5" RESC1608N 594.118,101.993 r90 top
R145 "PNM0603E1002BST5" RESC1608N 555.256,101.993 r90 top
R146 "PNM0603E1002BST5" RESC1608N 562.368,101.993 r90 top
R147 "CMF5546R400FHEB" AXIAL9.0 516.775,83.07 r90 top
R148 "CMF5546R400FHEB" AXIAL9.0 523.887,83.07 r90 top
R149 "PNM0603E1002BST5" RESC1608N 501.535,101.993 r90 top
R150 "PNM0603E1002BST5" RESC1608N 508,102 r90 top
R151 "PNM0603E1002BST5" RESC1608N 469.023,101.993 r90 top
R152 "PNM0603E1002BST5" RESC1608N 475.627,101.993 r90 top
R153 "PNM0603E1002BST5" RESC1608N 447.687,101.993 r90 top
R154 "PNM0603E1002BST5" RESC1608N 454.799,101.993 r90 top
R155 "PNM0603E1002BST5" RESC1608N 427.621,101.993 r90 top
R156 "PNM0603E1002BST5" RESC1608N 434.733,101.993 r90 top
R157 "PNM0603E1002BST5" RESC1608N 413.397,101.993 r90 top
R158 "PNM0603E1002BST5" RESC1608N 420.509,101.993 r90 top
R159 "PNM0603E1002BST5" RESC1608N 399.173,101.993 r90 top
R160 "PNM0603E1002BST5" RESC1608N 406.285,101.993 r90 top
R161 "PNM0603E1002BST5" RESC1608N 388.6,366.993 r90 top
R162 "PNM0603E1002BST5" RESC1608N 395.204,366.993 r90 top
R163 "RES 0.0 OHM" RESC1608M 71.751,355.399 r90 top
R164 "RES 0.0 OHM" RESC1608M 68.261,352.269 r90 top
R165 "RES 0.0 OHM" RESC1608M 49.291,355.399 r90 top
R166 "RES 0.0 OHM" RESC1608M 58.371,355.399 r90 top
R167 "CMF5546R400FHEB" AXIAL9.0 343.896,366.993 r90 top
R168 "CMF5546R400FHEB" AXIAL9.0 351.008,366.993 r90 top
R169 "CMF5546R400FHEB" AXIAL9.0 358.12,366.993 r90 top
R170 "CMF5546R400FHEB" AXIAL9.0 289,351.5 r90 top
R171 "CMF5546R400FHEB" AXIAL9.0 295.636,348.07 r90 top
R172 "CMF5546R400FHEB" AXIAL9.0 302.24,348.07 r90 top
R173 "CMF5546R400FHEB" AXIAL9.0 310,348 r90 top
R174 "FC0603E1000BST1" RESC1608N 317,350 r90 top
R175 "FC0603E1000BST1" RESC1608N 323.576,348.07 r90 top
R176 "FC0603E1000BST1" RESC1608N 330.688,348.07 r90 top
R177 "FC0603E1000BST1" RESC1608N 266.172,366.993 r90 top
R178 "FC0603E1000BST1" RESC1608N 273.284,366.993 r90 top
R179 "FC0603E1000BST1" RESC1608N 280.396,366.993 r90 top
R180 "FC0603E1000BST1" RESC1608N 252.456,366.993 r90 top
R181 "FC0603E1000BST1" RESC1608N 259.568,366.993 r90 top
R182 "FC0603E1000BST1" RESC1608N 238.5,367.5 r90 top
R183 "FC0603E1000BST1" RESC1608N 245.344,366.993 r90 top
R184 "PNM0603E1002BST5" RESC1608N 216.896,366.993 r90 top
R185 "PNM0603E1002BST5" RESC1608N 224.008,366.993 r90 top
R186 "PNM0603E1002BST5" RESC1608N 231.12,366.993 r90 top
R187 "PNM0603E1002BST5" RESC1608N 195.56,366.993 r90 top
R188 "PNM0603E1002BST5" RESC1608N 202.672,366.993 r90 top
R189 "PNM0603E1002BST5" RESC1608N 209.784,366.993 r90 top
R190 "CMF5546R400FHEB" AXIAL9.0 151.618,366.993 r90 top
R191 "CMF5546R400FHEB" AXIAL9.0 158.73,366.993 r90 top
R192 "CMF5546R400FHEB" AXIAL9.0 432.297,206.106 r90 top
R193 "PNM0603E1002BST5" RESC1608N 439.409,206.106 r90 top
R194 "PNM0603E1002BST5" RESC1608N 251,396.5 r90 top
R195 "PNM0603E1002BST5" RESC1608N 377,410.5 r90 top
R196 "PNM0603E1002BST5" RESC1608N 401.5,342.5 r90 top
R197 "ERJ-3GEYJ100V" RESC1608N 16.6,79.51 r90 top
R198 "ERJ-3GEYJ100V" RESC1608N -104.66,92.86 r90 top
R199 "ERJ-3GEYJ100V" RESC1608N -57.01,68.21 r90 top
R200 "ERJ-3GEYJ100V" RESC1608N -61.46,61.21 r0 top
R201 "PNM0603E1002BST5" RESC1608N 16.59,72.51 r90 top
R202 "PNM0603E1002BST5" RESC1608N -49.46,61.21 r0 top
R203 "PNM0603E1002BST5" RESC1608N -49.51,57.71 r180 top
R204 "RES 0.0 OHM" RESC1608M 56.5,58.02 r0 bottom
R205 "PNM0603E1002BST5" RESC1608N -84.25,89.35 r90 top
R206 "RES 0.0 OHM" RESC1608M 65.42,58.03 r0 bottom
R207 "FC0603E1000BST1" RESC1608N 62.25,58.89 r270 bottom
R208 "FC0603E1000BST1" RESC1608N 59.68,58.87 r270 bottom
R209 "FC0603E1000BST1" RESC1608N -45.51,55.21 r270 top
R210 "FC0603E1000BST1" RESC1608N -61.51,54.21 r180 top
R211 "FC0603E1000BST1" RESC1608N -85.25,93.35 r180 top
R212 "FC0603E1000BST1" RESC1608N -97.25,90.35 r180 top
R213 "PNM0603E1002BST5" RESC1608N 64.56,62.72 r270 bottom
R214 "PNM0603E1002BST5" RESC1608N 57.61,62.78 r270 bottom
R215 "PNM0603E1002BST5" RESC1608N 30,69.45 r180 top
R216 "PNM0603E1002BST5" RESC1608N -33.4,113.35 r270 top
R217 "PNM0603E1002BST5" RESC1608N -48.1,115.7 r0 top
R218 "PNM0603E1002BST5" RESC1608N -36,81.95 r180 top
R219 "RES 100 OHM" RESC2012M -82.35,122.75 r90 top
R220 "RES 50 OHM" RESC3216M -84.556,135.652 r90 top
R221 "RES 50 OHM" RESC3216M -87.75,127.85 r90 top
R222 "RES 50 OHM" RESC3216M -77.54,135.652 r90 top
R223 "RES 50 OHM" RESC3216M 73.27,86.35 r180 top
R224 "RES 50 OHM" RESC3216M 73.27,101.35 r180 top
R225 "RES 0.0 OHM" RESC1608M -140.49,119.46 r90 top
R226 "RES 0.0 OHM" RESC1608M -161.53,131.46 r90 top
R227 "RES 0.0 OHM" RESC1608M -161.53,119.46 r90 top
R228 "RES 0.0 OHM" RESC1608M -140.49,131.46 r90 top
R229 "RES 0.0 OHM" RESC1608M -143.26,119.46 r90 top
R230 "RES 0.0 OHM" RESC1608M -164.16,131.46 r90 top
R231 "RES 0.0 OHM" RESC1608M -164.16,119.46 r90 top
R232 "RES 0.0 OHM" RESC1608M -143.26,131.46 r90 top
R233 "FC0603E1000BST1" RESC1608N -147.32,130.71 r180 top
R234 "FC0603E1000BST1" RESC1608N -136.75,130.71 r0 top
R235 "FC0603E1000BST1" RESC1608N -168.13,130.71 r180 top
R236 "FC0603E1000BST1" RESC1608N -157.74,130.71 r0 top
R237 "FC0603E1000BST1" RESC1608N -168.13,125.71 r180 top
R238 "FC0603E1000BST1" RESC1608N -157.74,125.71 r0 top
R239 "FC0603E1000BST1" RESC1608N -147.32,125.71 r180 top
R240 "FC0603E1000BST1" RESC1608N -136.75,125.71 r0 top
R241 "PNM0603E1002BST5" RESC1608N -147.46,137.71 r0 top
R242 "PNM0603E1002BST5" RESC1608N -136.75,137.71 r180 top
R243 "PNM0603E1002BST5" RESC1608N -168.13,137.71 r180 top
R244 "PNM0603E1002BST5" RESC1608N -157.74,137.71 r180 top
R245 "PNM0603E1002BST5" RESC1608N -43.5,156.5 r270 top
R246 "PNM0603E1002BST5" RESC1608N -41,146 r270 top
R247 "PNM0603E1002BST5" RESC1608N -32.5,153.5 r270 top
R248 "PNM0603E1002BST5" RESC1608N -30.3,75.4 r270 top
R249 "ERJ-3GEY0R00V" CAPC1608N 5,212.2 r270 top
R250 "ERJ-3GEY0R00V" CAPC1608N 32,212.2 r270 top
R251 "ERJ-3GEY0R00V" CAPC1608N 5,177.2 r270 top
R252 "ERJ-3GEY0R00V" CAPC1608N 32,177.2 r270 top
R253 "RES 4.7K" RESC2012N 15,208 r0 top
R254 "RES 4.7K" RESC2012N 46,209 r270 top
R255 "RES 4.7K" RESC2012N 15,173 r0 top
R256 "RES 4.7K" RESC2012N 46,174 r270 top
R257 "RES 1.0K" RESC2012M 15,205 r180 top
R258 "RES 1.5K" RESC2012M 46,203 r270 top
R259 "RES 1.0K" RESC2012M 15,170 r180 top
R260 "RES 1.5K" RESC2012M 46,168 r270 top
R261 "ERJ-3GEY0R00V" CAPC1608N 65,212.2 r270 top
R262 "ERJ-3GEY0R00V" CAPC1608N 92,212.2 r270 top
R263 "ERJ-3GEY0R00V" CAPC1608N 65,177.2 r270 top
R264 "ERJ-3GEY0R00V" CAPC1608N 92,177.2 r270 top
R265 "RES 4.7K" RESC2012N 75,208 r0 top
R266 "RES 4.7K" RESC2012N 106,209 r270 top
R267 "RES 4.7K" RESC2012N 75,173 r0 top
R268 "RES 4.7K" RESC2012N 106,174 r270 top
R269 "RES 1.0K" RESC2012M 75,205 r180 top
R270 "RES 1.5K" RESC2012M 106,203 r270 top
R271 "RES 1.0K" RESC2012M 75,170 r180 top
R272 "RES 1.5K" RESC2012M 106,168 r270 top
R273 "ERJ-3GEY0R00V" CAPC1608N 4.5,142.2 r270 top
R274 "RES 4.7K" RESC2012N 19.75,144 r270 top
R275 "RES 1.0K" RESC2012M 15.8,137.75 r270 top

## Footprints (in the part's own frame and the unit in brackets; to place one, negate y for a bottom-side part, rotate by r counter-clockwise, add the part's x,y. Pads: shape width x height; smd on the part's side, far side on the other; paste and mask are expansions set on the pad)
AF320 [mm]
  rect 1.52x1.52 smd: 1(0,0) 3(4.32,0)
  rect 2.03x1.65 smd: 2(2.16,-2.095) 4(2.16,2.095)
  silkscreen extent -0.72,-2.82 5.05,2.82, body extent 0,-1.99 4.3,2, height 1.45
AN1102 [mm]
  rect 0.56x2.21 smd: 1(5.6,1.79) 2(6.87,1.79) 3(8.14,1.79) 4(9.41,1.79) 12(9.41,-9.41) 13(8.14,-9.41) 14(6.87,-9.41) 15(5.6,-9.41) 16(4.33,-9.41) 17(3.06,-9.41) 18(1.79,-9.41) 26(1.79,1.79) 27(3.06,1.79) 28(4.33,1.79)
  rect 2.21x0.56 smd: 5(11.2,0) 6(11.2,-1.27) 7(11.2,-2.54) 8(11.2,-3.81) 9(11.2,-5.08) 10(11.2,-6.35) 11(11.2,-7.62) 19(0,-7.62) 20(0,-6.35) 21(0,-5.08) 22(0,-3.81) 23(0,-2.54) 24(0,-1.27) 25(0,0)
  silkscreen extent -1,-10.41 12.2,2.79, body extent -0.9,-10.32 12.1,2.7, height 1.55
AT1029 [mm]
  rect 1.52x0.76 smd: 1(3.15,0) 2(3.15,-1.27) 3(3.15,-2.54) 4(0,-2.54) 6(0,0)
  silkscreen extent -1.15,-3.18 4.4,0.64, body extent 0,-2.55 3.2,0, height 3.94
Axial3 [mm] "CONN TERM BLK HDR 2.5MM 3POS"
  round 1.7 hole 1.2: 1(0,0) 2(2.5,0) 3(5,0)
  silkscreen extent -2.6,-4.4 7.3,4.25, body extent -2.35,-4.15 7.05,4, height 10.1
AXIAL9.0 [mm] "RES 46.4 OHM 1% 50PPM 1/2W"
  round 1.4 hole 0.85: 1(-7.275,0) 2(1.715,0)
  silkscreen extent -5.68,-0.85 0.3,0.83, body extent -5.72,-1.14 0.38,1.16, height 2.64
CAPC1608N [mm] "Chip Capacitor, Body 1.6x0.8mm, IPC Medium Density"
  rect 1x1 smd: 1(-0.8,0) 2(0.8,0)
  body extent -0.87,-0.48 0.87,0.48, height 0.85
CAPC2012M [mm] "Chip Capacitor, Body 2.0x1.3mm, IPC Low Density"
  rect 1.5x1.6 smd: 1(-0.95,0) 2(0.95,0)
  body extent -1.1,-0.72 1.1,0.72, height 1.1
CAPC3216M [mm] "Chip Capacitor, Body 3.2x1.6mm, IPC Low Density"
  rect 1.5x1.9 smd: 1(-1.55,0) 2(1.55,0)
  silkscreen extent -0.4,-0.85 0.4,0.85, body extent -1.7,-0.9 1.7,0.9, height 1.35
CD542 [mm] "Minicircuits-ADC-10-4"
  rect 2.54x1.65 smd: 1(-2.54,2.54) 2(-2.54,0) 3(-2.54,-2.54) 4(2.54,-2.54) 5(2.54,0) 6(2.54,2.54)
  silkscreen extent -1.12,-3.95 1.12,3.95, body extent -2.8,-3.94 2.8,3.94, height 2.84
D-SUB62 [mm] "CONN D-SUB PLUG R/A 62POS 30GOLD"
  round 1.7 hole 1.25: 1(0,0) 2(-2.41,0) 3(-4.82,0) 4(-7.23,0) 5(-9.64,0) 6(-12.05,0) 7(-14.46,0) 8(-16.87,0) 9(-19.28,0) 10(-21.69,0) 11(-24.1,0) 12(-26.51,0) 13(-28.92,0) 14(-31.33,0) 15(-33.74,0) 16(-36.15,0) 17(-38.56,0) 18(-40.97,0) 19(-43.38,0) 20(-45.79,0) 21(-48.2,0) 22(1.205,2.54) 23(-1.205,2.54) 24(-3.615,2.54) 25(-6.025,2.54) 26(-8.435,2.54) 27(-10.845,2.54) 28(-13.255,2.54) 29(-15.665,2.54) 30(-18.075,2.54) 31(-20.485,2.54) 32(-22.895,2.54) 33(-25.305,2.54) 34(-27.715,2.54) 35(-30.125,2.54) 36(-32.535,2.54) 37(-34.945,2.54) 38(-37.355,2.54) 39(-39.765,2.54) 40(-42.175,2.54) 41(-44.585,2.54) 42(-46.995,2.54) 43(0,5.08) 44(-2.41,5.08) 45(-4.82,5.08) 46(-7.23,5.08) 47(-9.64,5.08) 48(-12.05,5.08) 49(-14.46,5.08) 50(-16.87,5.08) 51(-19.28,5.08) 52(-21.69,5.08) 53(-24.1,5.08) 54(-26.51,5.08) 55(-28.92,5.08) 56(-31.33,5.08) 57(-33.74,5.08) 58(-36.15,5.08) 59(-38.56,5.08) 60(-40.97,5.08) 61(-43.38,5.08) 62(-45.79,5.08)
  round 4.45 hole 3.3: 63(-55.19,2.54) 64(8.2,2.54)
  silkscreen extent -58.64,-2.3 14.16,15.51, body extent -58.5,-2.15 14,10.4, height 12.5
DBV005 [mm] "TPS73030"
  rect 1x0.6 smd: 1(0,0) 2(0,-0.95) 3(0,-1.9) 4(2.7,-1.9) 5(2.7,0)
  silkscreen extent 0.2,-2.45 1.6,0.82, body extent 0.48,-2.47 2.22,0.58, height 1.45
"DD Pak" [mm]
  rect 2.4x1.1 smd: 1(0,0.004) 2(0,-1.698) 3(0,-3.4) 4(0,-5.102) 5(0,-6.804)
  rect 9x10.7 smd: 6(8.65,-3.4)
  silkscreen extent -0.12,-8.65 8.15,1.85, body extent 2.75,-8.67 12.15,1.88, height 4.57
DG983-1 [mm]
  rect 0.81x0.25 smd: 1(-1.845,1) 2(-1.845,0.5) 3(-1.845,0) 4(-1.845,-0.5) 5(-1.845,-1) 11(1.845,-1) 12(1.845,-0.5) 13(1.845,0) 14(1.845,0.5) 15(1.845,1)
  rect 0.25x0.81 smd: 6(-1,-1.845) 7(-0.5,-1.845) 8(0,-1.845) 9(0.5,-1.845) 10(1,-1.845) 16(1,1.845) 17(0.5,1.845) 18(0,1.845) 19(-0.5,1.845) 20(-1,1.845)
  rect 2.06x2.06 smd: 21(0,0)
  silkscreen extent -2.93,-2 2,2, body extent -2,-2 2,2, height 0.9
FV1206 [mm]
  rect 1.04x1.8 smd: 1(0,0) 3(3.25,0)
  rect 0.61x1.245 smd: 2(1.65,-0.927) 4(1.65,0.927)
  silkscreen extent -1.05,-1.97 4.45,1.99, body extent 0.05,-1.2 3.4,1.16, height 1
HDR1X2H [mm] "Connector; Header; 2 Position; Right Angle"
  rect 1.5x1.5 hole 0.9: 1(0,0)
  round 1.5 hole 0.9: 2(2.54,0)
  silkscreen extent -1.27,-6.35 3.81,-1.27
HU1186 [mm]
  rect 1.52x1.52 smd: 1(0,0) 2(0,-2.54) 3(0,-5.08) 4(0,-7.62) 5(0,-10.16) 6(0,-12.7) 7(0,-15.24) 8(21.59,-15.24) 9(21.59,-12.7) 10(21.59,-10.16) 11(21.59,-7.62) 12(21.59,-5.08) 13(21.59,-2.54) 14(21.59,0)
  silkscreen extent 1.59,-16.51 20,1.27, body extent 1.49,-16.61 20.1,1.37, height 6.35
JQ1382 [mm]
  rect 2.2x2 smd: 1(3.1,0) 2(5.65,0) 3(8.55,0) 4(11.1,0) 6(14.7,9.8) 7(11.5,10) 8(3,10) 9(0,9.8) 11(0,0.2)
  rect 2x2.2 smd: 5(14.8,5) 10(-0.2,5)
  rect 8x4 smd: 12(7.4,5)
  rect 0x0 smd: 13(3.73,3.434) 14(5.88,3.434) 15(6.23,5.934) 16(6.23,3.784) 17(8.73,3.434) 18(6.58,3.434) 19(6.23,0.934) 20(6.23,3.084)
  silkscreen extent 1.06,1.17 13.44,8.81, body extent 0.22,0.57 14.14,10.46, height 3
RESC1005L [mm] "Chip Resistor, Body 1.1x0.5mm, IPC High Density"
  rect 0.6x0.6 smd: 1(-0.5,0) 2(0.5,0)
  body extent -0.55,-0.3 0.55,0.3, height 0.4
RESC1608M [mm] "Chip Resistor, Body 1.6x0.8mm, IPC Low Density"
  rect 1.1x1.1 smd: 1(-0.95,0) 2(0.95,0)
  silkscreen extent -0.2,-0.45 0.2,0.45, body extent -0.85,-0.48 0.85,0.48, height 0.6
RESC1608N [mm] "Chip Resistor, Body 1.6x0.8mm, IPC Medium Density"
  rect 0.9x1 smd: 1(-0.85,0) 2(0.85,0)
  silkscreen extent -0.2,-0.4 0.2,0.4, body extent -0.85,-0.48 0.85,0.48, height 0.6
RESC2012M [mm] "Chip Resistor, Body 2.0x1.3mm, IPC Low Density"
  rect 1.4x1.5 smd: 1(-1,0) 2(1,0)
  silkscreen extent 0,-0.65 0,0.65, body extent -1.07,-0.7 1.07,0.7, height 0.65
RESC2012N [mm] "Chip Resistor, Body 2.0x1.3mm, IPC Medium Density"
  rect 1.2x1.4 smd: 1(-0.9,0) 2(0.9,0)
  silkscreen extent 0,-0.6 0,0.6, body extent -1.07,-0.7 1.07,0.7, height 0.65
RESC3216M [mm] "Chip Resistor, Body 3.2x1.6mm, IPC Low Density"
  rect 1.5x1.9 smd: 1(-1.55,0) 2(1.55,0)
  silkscreen extent -0.4,-0.85 0.4,0.85, body extent -1.68,-0.87 1.68,0.87, height 0.71
RTDX2 [mm] "Footprint model for RTD PT100 US sensor"
  rect 1.5x1.5 hole 0.9: 1(0,0)
  round 1.5 hole 0.9: 2(2.54,0)
  round 0.5 all layers, no hole: 3(2.56,-1.27)
  Top Layer region: 2.35,-1.27 2.775,-1.27 2.775,0 2.35,0
  silkscreen extent -1.27,-1.88 3.81,1.27, body extent 0.5,-0.75 2,0.75, height 6.8
SMAedge50R [mm] "SMA connector for RF board edge"
  rect 1.524x5.5 smd: 1(0,0) 2(8.5,0)
  rect 1.524x5.5 smd far side: 3(0,0) 4(8.5,0)
  rect 1.5x5.5 smd: 5(4.25,0)
  silkscreen extent -1.94,-4.49 -1.27,-3.81, body extent -0.75,-17.1 9.25,2, height 3.96
TC3528-1411 [mm] "Capacitor, SM Tantalum; Body 3.5 x 2.8 mm (LxW typ)"
  rect 2x2.2 smd: 1(-1.5,0) 2(1.5,0)
  silkscreen extent -2.82,-1.5 1.85,1.63, body extent -1.75,-1.25 1.75,1.29, height 1.9
TC7343-2917 [mm] "Capacitor, SM Tantalum; Body 7.3 x 4.3 mm (LxW typ)"
  rect 2.6x2.4 smd: 1(-3.2,0) 2(3.2,0)
  silkscreen extent -4.57,-2.3 3.8,2.43, body extent -3.7,-2.02 3.71,2.06, height 4
TSOT-23 [mm]
  rect 1.2x0.65 smd: 1(0,0) 2(0,-0.95) 3(0,-1.9) 4(2.6,-1.9) 5(2.6,0)
  silkscreen extent -0.12,-2.45 1.6,1, body extent 0.38,-2.45 2.12,0.55, height 1
TST-TA0568A [mm] "Filtro TST-TA0568A"
  rect 1.47x0.84 smd: 1(0,0) 2(0,-1.27) 3(0,-2.54) 5(3.73,-2.54) 6(3.73,-1.27) 7(3.73,0)
  rect 0.84x1.47 smd: 4(1.865,-3.135)
  rect 0.84x2.28 smd: 8(1.865,0.176)
  silkscreen extent -0.64,-4.46 4.37,1.76, body extent -0.08,-3.4 3.74,0.85, height 1.7